# EAGLE board PCB (EAGLE 9.7.0)
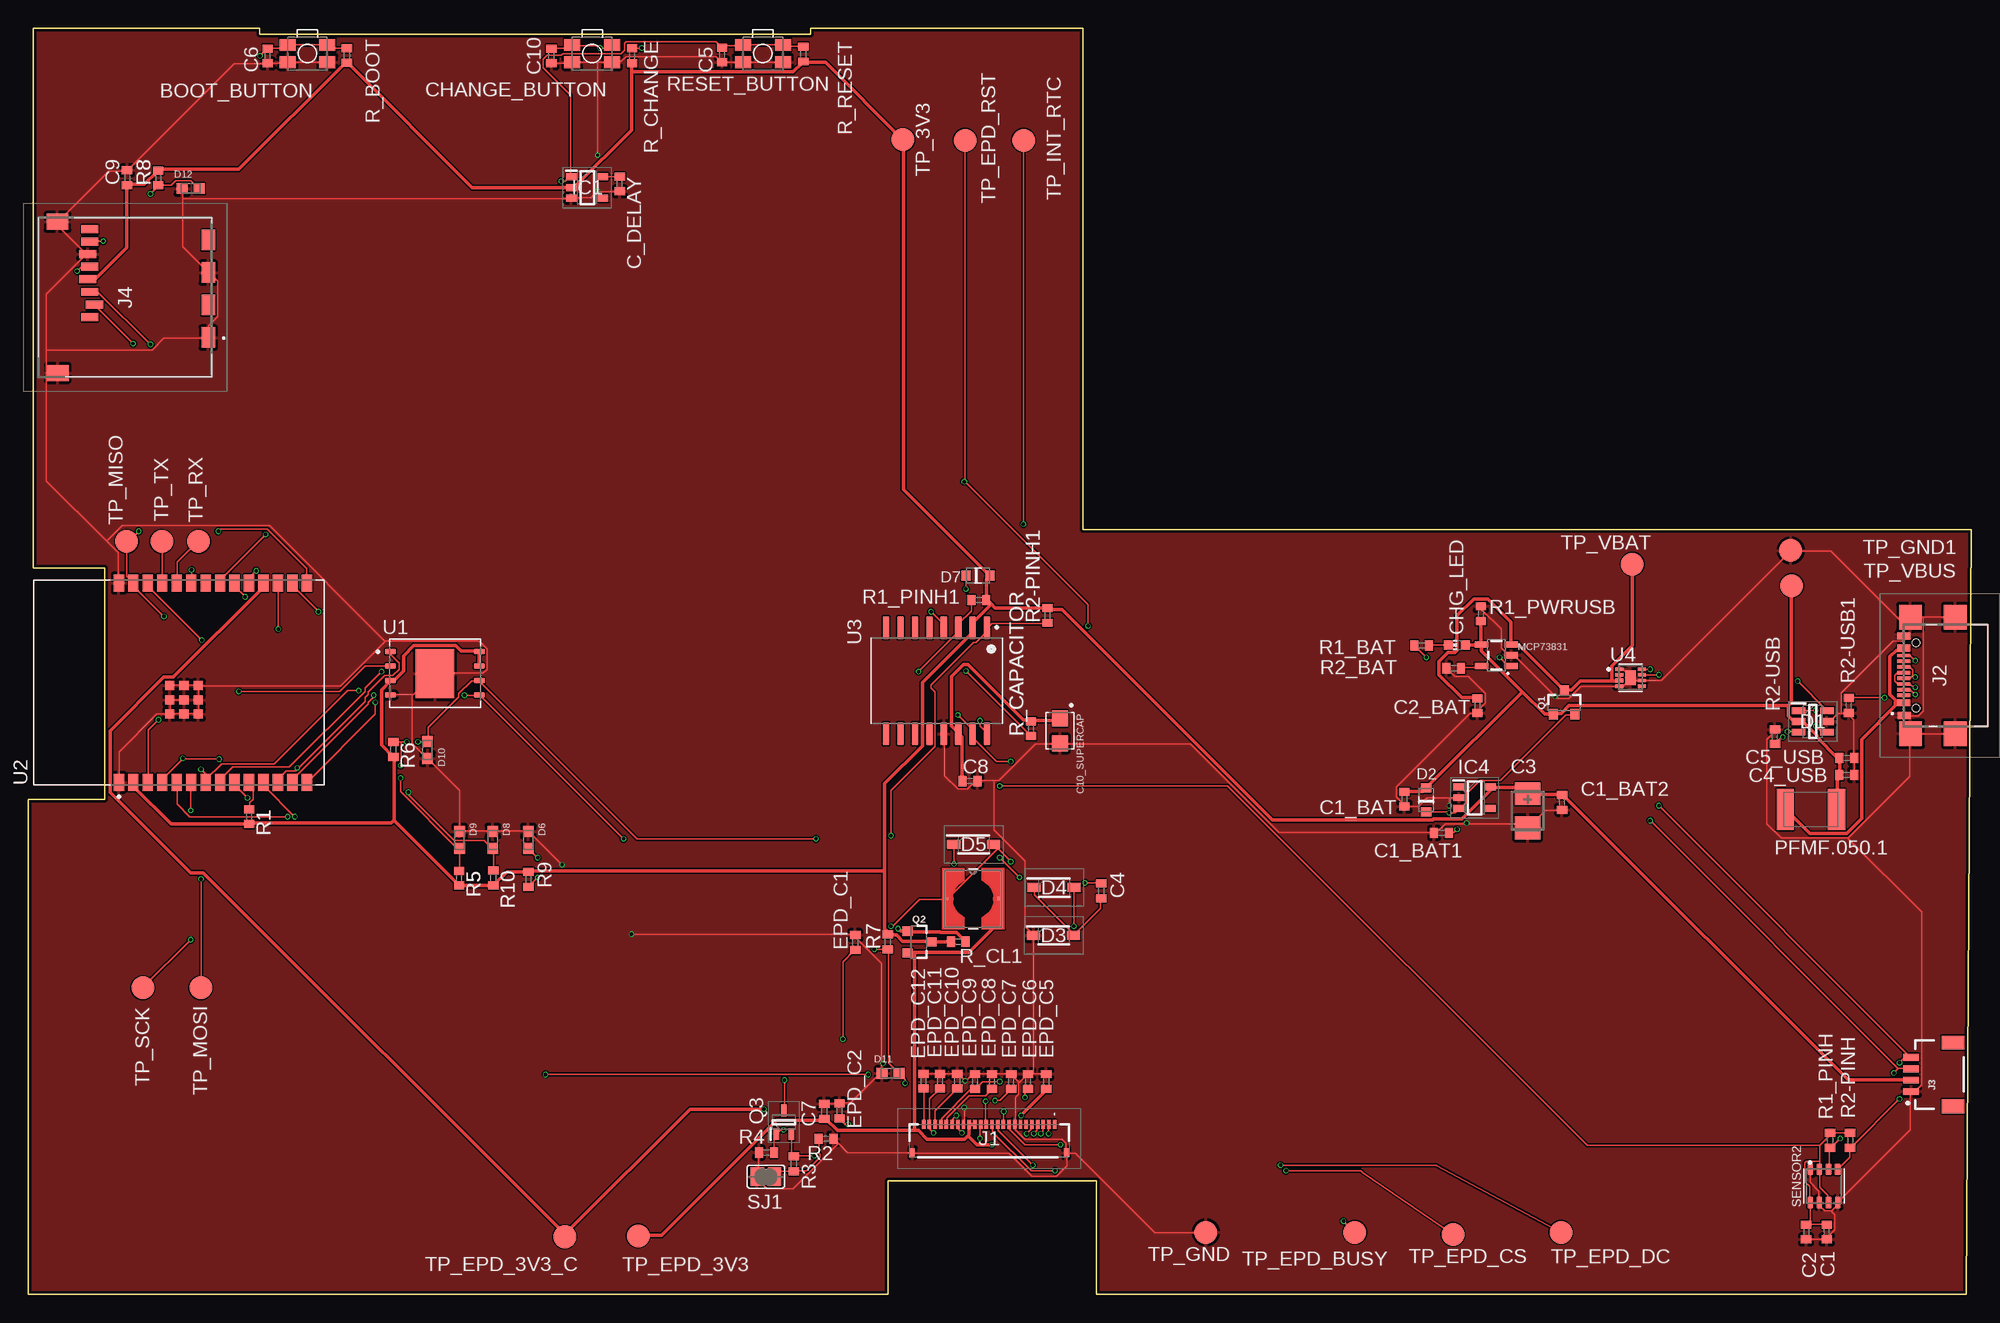
[diagram p0: board, top side]
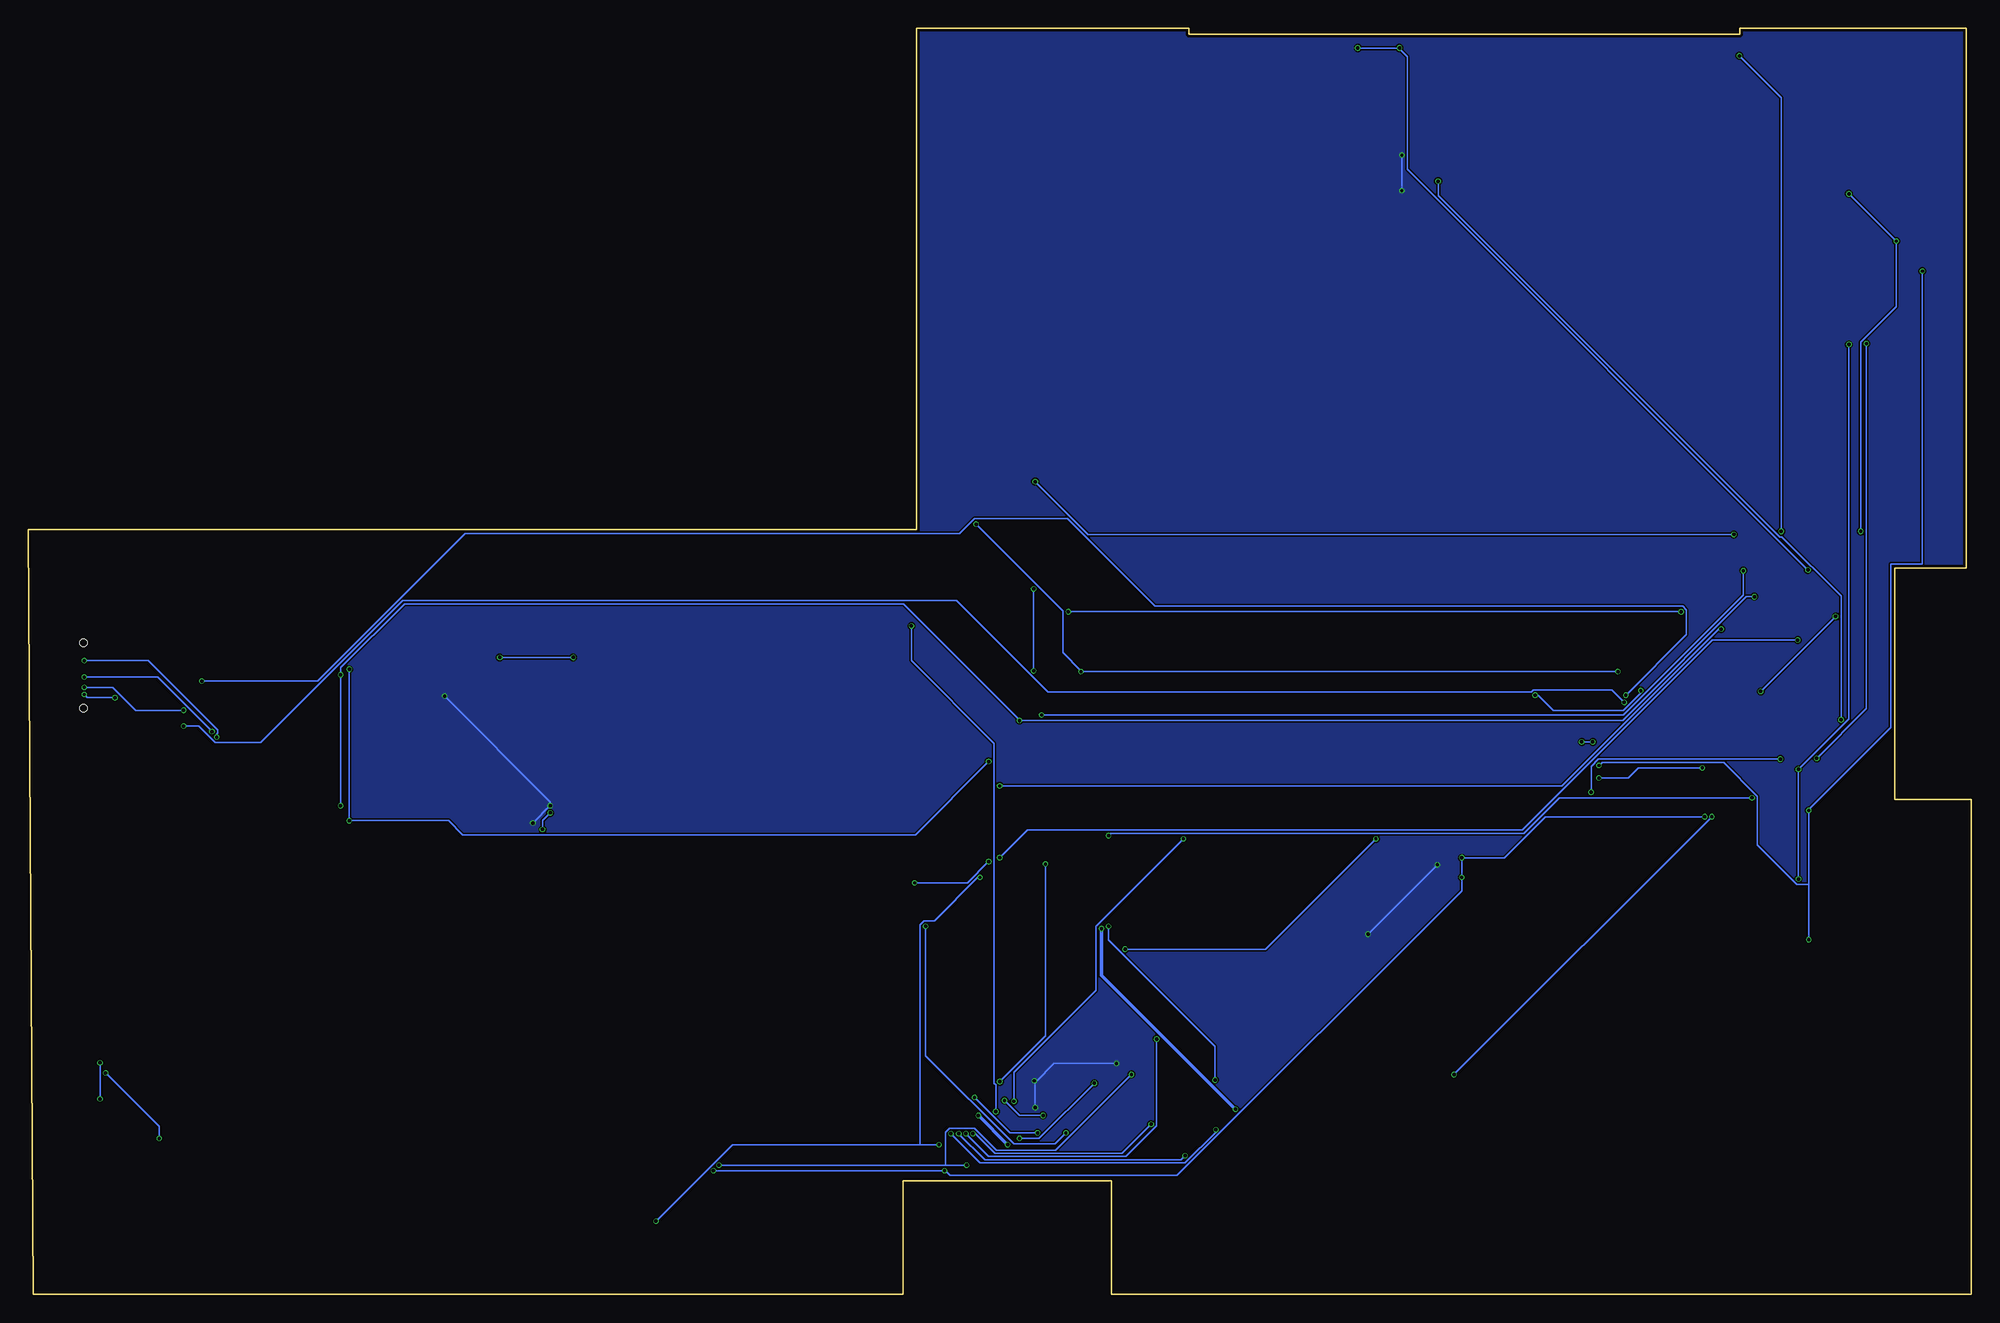
[diagram p1: board, bottom side, seen from below]

Size 170.6 x 111.2 mm. Coordinates in mm from the lower left corner, seen from the top.
Outline: 170.2,0 170.6,67.2 92.6,67.2 92.6,111.2 68.7,111.2 68.7,110.68 20.3,110.68 20.3,111.2 0.4,111.2 0.4,63.8 6.7,63.8 6.7,43.5 0,43.5 0,0 75.5,0 75.5,10 93.78,10 93.78,0 170.2,0
Copper layers (1*16): Top 0.035mm / dielectric 1.6mm / Bottom 0.035mm
Design rules "jlcpcb-2layers.dru *": minimum track width 5mil, minimum drill 0.3mm, track to track 5mil, track to pad 5mil, pad to pad 5mil, via to via 5mil, smd to smd 5mil, copper to edge 0.2mm, drill to drill 6mil, minimum pad ring 10mil, minimum via ring 3mil, stop-mask expansion 4mil, vias tented up to drill 0mil, thermal gap 10mil
Net classes: 0 default: width 0.15 mm; 1 Power: width 0.3 mm

## Footprints (pad centres in the part's own frame; a part is rotated, then mirrored left to right if it is on the bottom)
MYBUTTON = smd 1.4 x 1.05: 1 1.75,0.75; 2 -1.75,0.75; 3 -1.75,-0.75; 4 1.75,-0.75
EAGLE-LTSPICE_C0402 = smd 0.7 x 0.9: 1 -0.65,0; 2 0.65,0
RCL_CT3528 = smd 2 x 2.2: + -1.5,0; - 1.5,0
CAPCP3225X100N = smd 1.4 x 1.4: 1 -1.1,0; 2 1.1,0
ADAFRUIT_CHIP-LED0603 = smd 0.8 x 0.8: A 0,-0.75; C 0,0.75
SOT95P280X145-6N = smd 1.2 x 0.6: 1 -1.25,0.95; 2 -1.25,0; 3 -1.25,-0.95; 4 1.25,-0.95; 5 1.25,0; 6 1.25,0.95
ESP32_WROVER_AVX---SD0805S020S1R0_AVX_SD0805S020S1R0_0 = smd 0.8 x 0.9: 1 -1.05,0; 2 1.05,0
SOD3716X135N = smd 1.15 x 0.8: 1 -1.75,0; 2 1.75,0
DIOC1608X36N = smd 0.97 x 0.94: 1 -0.75,0; 2 0.75,0
SOT95P280X125-5N = smd 0.9 x 0.6: 1 -1.4,0.95; 2 -1.4,0; 3 -1.4,-0.95; 4 1.4,-0.95; 5 1.4,0.95
SOT95P280X120-5N = smd 0.9 x 0.6: 1 -1.4,0.95; 2 -1.4,0; 3 -1.4,-0.95; 4 1.4,-0.95; 5 1.4,0.95
FH34SRJ24S05SH99 = smd 0.3 x 0.8: 1 5.75,1.45; 2 5.25,1.45; 3 4.75,1.45; 4 4.25,1.45; 5 3.75,1.45; 6 3.25,1.45; 7 2.75,1.45; 8 2.25,1.45; 9 1.75,1.45; 10 1.25,1.45; 11 0.75,1.45; 12 0.25,1.45; 13 -0.25,1.45; 14 -0.75,1.45; 15 -1.25,1.45; 16 -1.75,1.45; 17 -2.25,1.45; 18 -2.75,1.45; 19 -3.25,1.45; 20 -3.75,1.45; 21 -4.25,1.45; 22 -4.75,1.45; 23 -5.25,1.45; 24 -5.75,1.45 | smd 0.4 x 0.8: MP1 6.75,-1.05; MP2 -6.75,-1.05
SAMACSYS_PARTS_USB4110GFA = smd 0.3 x 1.15: A1 -3.652,3.658; A4 -2.55,3.678; A5 -1.25,3.678; A6 -0.25,3.678; A7 0.25,3.678; A8 1.25,3.678; A9 2.55,3.678; A12 3.612,3.678; B1 3.312,3.678; B4 2.25,3.678; B5 1.75,3.678; B6 0.75,3.678; B7 -0.75,3.678; B8 -1.75,3.678; B9 -2.25,3.678; B12 -3.352,3.658 | smd 2.18 x 2: MP1 -5.11,-0.827; MP2 5.11,-0.827; MP3 -5.11,3.103; MP4 5.11,3.103 | hole 0.65: -2.89,2.603; 2.89,2.603
JST04_1MM_RA = smd 0.6 x 1.35: 1 -1.5,0; 2 -0.5,0; 3 0.5,0; 4 1.5,0 | smd 1.2 x 2: NC1 2.8,-3.675; NC2 -2.8,-3.675
112ATAARR03ATTEND = smd 1.8 x 1.2: G1 10.6,10.4; G2 4.9,10.4; S1 7.75,10.4; S2 2.05,10.4 | smd 1.4 x 1.9: G3 13.724,-2.814; G4 0.45,-2.85 | smd 0.7 x 1.5: P1 8.8,0; P2 7.7,0.4; P3 6.6,0; P4 5.5,-0.2; P5 4.4,0; P6 3.3,-0.2; P7 2.2,0; P8 1.1,0
IND_4828-WE-TPC_WRE = smd 0.15 x 0.15: 1 -2.286,0 | smd 0.3 x 0.3: 2 2.286,0
ESP32_WROVER_SPARKFUN-IC-POWER_SOT23-5 = smd 0.55 x 1.2: 1 -0.95,-1.3; 2 0,-1.3; 3 0.95,-1.3; 4 0.95,1.3; 5 -0.95,1.3
ESP32C6_VARISTOR_CT/CN1812 = smd 1.5 x 3.6: 1 -2.25,0; 2 2.25,0
ESP32_WROVER_SPARKFUN-DISCRETESEMI_SOT23-3 = smd 0.8 x 0.9: 1 -0.95,-1; 2 0.95,-1; 3 0,1.1
SOT65P210X110-3N = smd 1.05 x 0.5: 1 -1.05,0.65; 2 -1.05,-0.65; 3 1.05,0
ESP32_WROVER_EAGLE-LTSPICE_R0402 = smd 0.7 x 0.9: 1 -0.65,0; 2 0.65,0
ESP32_WROVER_BME680_PSON80P300X300X100-8N = smd 1.016 x 0.5: 1 1.458,1.2; 2 1.458,0.4; 3 1.458,-0.4; 4 1.458,-1.2; 5 -1.458,-1.22; 6 -1.458,-0.4; 7 -1.458,0.4; 8 -1.458,1.2
SJ = smd 1.168 x 1.6: 1 -0.762,0; 2 0.762,0
TP20R = smd 2 x 2: TP 0,0
SON127P600X800X80-9N = smd 0.94 x 0.44: 1 -3.895,1.905; 2 -3.895,0.635; 3 -3.895,-0.635; 4 -3.895,-1.905; 5 3.895,-1.905; 6 3.895,-0.635; 7 3.895,0.635; 8 3.895,1.905 | smd 3.4 x 4.3: 9 0,0
XCVR_ESP32-C6-WROOM-1-N8 = smd 1.5 x 0.9: 1 -8.75,5.26; 2 -8.75,3.99; 3 -8.75,2.72; 4 -8.75,1.45; 5 -8.75,0.18; 6 -8.75,-1.09; 7 -8.75,-2.36; 8 -8.75,-3.63; 9 -8.75,-4.9; 10 -8.75,-6.17; 11 -8.75,-7.44; 12 -8.75,-8.71; 13 -8.75,-9.98; 14 -8.75,-11.25; 15 8.75,-11.25; 16 8.75,-9.98; 17 8.75,-8.71; 18 8.75,-7.44; 19 8.75,-6.17; 20 8.75,-4.9; 21 8.75,-3.63; 22 8.75,-2.36; 23 8.75,-1.09; 24 8.75,0.18; 25 8.75,1.45; 26 8.75,2.72; 27 8.75,3.99; 28 8.75,5.26 | smd 0.8 x 0.8: 29_1 -2.755,0.79; 29_2 -1.505,0.79; 29_3 -0.255,0.79; 29_4 -2.755,-0.46; 29_5 -1.505,-0.46; 29_6 -0.255,-0.46; 29_7 -2.755,-1.71; 29_8 -1.505,-1.71; 29_9 -0.255,-1.71
SOIC127P1032X265-16N = smd 2.05 x 0.59: 1 -4.655,4.445; 2 -4.655,3.175; 3 -4.655,1.905; 4 -4.655,0.635; 5 -4.655,-0.635; 6 -4.655,-1.905; 7 -4.655,-3.175; 8 -4.655,-4.445; 9 4.655,-4.445; 10 4.655,-3.175; 11 4.655,-1.905; 12 4.655,-0.635; 13 4.655,0.635; 14 4.655,1.905; 15 4.655,3.175; 16 4.655,4.445
SON50P200X200X80-9N = smd 0.76 x 0.27: 1 -0.985,0.75; 4 -0.985,-0.75; 5 0.985,-0.75; 6 0.985,-0.25; 7 0.985,0.25; 8 0.985,0.75 | smd 0.76 x 0.3: 2 -0.985,0.25; 3 -0.985,-0.25 | smd 0.9 x 1.3: 9 0,0

## Placement (x,y rotation side)
BOOT_BUTTON  BUTTON_CUSYOMV1  [MYBUTTON]  24.5,109 180 top
C1  100nF  [EAGLE-LTSPICE_C0402]  157.94,5.49 270 top
C1_BAT  4.7uF  [EAGLE-LTSPICE_C0402]  120.83,43.51 270 top
C1_BAT1  4.7uF  [EAGLE-LTSPICE_C0402]  124.09,40.55 180 top
C1_BAT2  4.7uF  [EAGLE-LTSPICE_C0402]  134.68,43.23 270 top
C2  100nF  [EAGLE-LTSPICE_C0402]  156.12,5.49 270 top
C2_BAT  4.7uF  [EAGLE-LTSPICE_C0402]  127.24,51.71 270 top
C3  100uF TANT  [RCL_CT3528]  131.66,42.49 270 top
C4  4.7uF/25V  [EAGLE-LTSPICE_C0402]  94.21,35.45 90 top
C4_USB  100nF  [EAGLE-LTSPICE_C0402]  159.69,45.63 0 top
C5  1uF  [EAGLE-LTSPICE_C0402]  60.92,108.87 270 top
C5_USB  4.7uF  [EAGLE-LTSPICE_C0402]  159.7,47.13 0 top
C6  100nF  [EAGLE-LTSPICE_C0402]  21,108.79 270 top
C7  10uF  [EAGLE-LTSPICE_C0402]  69.89,16.09 90 top
C8  100nF  [EAGLE-LTSPICE_C0402]  82.68,45.09 0 top
C9  100nF  [EAGLE-LTSPICE_C0402]  8.66,98.09 90 top
C10  100nF  [EAGLE-LTSPICE_C0402]  45.92,108.79 270 top
C10_SUPERCAP  CPH3225A  [CAPCP3225X100N]  90.59,49.5 270 top
C_DELAY  100nF  [EAGLE-LTSPICE_C0402]  51.93,97.55 270 top
CHANGE_BUTTON  BUTTON_CUSYOMV1  [MYBUTTON]  49.5,109 180 top
CHG_LED  [ADAFRUIT_CHIP-LED0603]  125.45,57.05 90 top
D1  USBLC6-2SC6Y  [SOT95P280X145-6N]  156.7,50.33 0 top
D2  SD0805S020S1R0  [ESP32_WROVER_AVX---SD0805S020S1R0_AVX_SD0805S020S1R0_0]  122.74,43.44 90 top
D3  MBR0530  [SOD3716X135N]  90.03,31.54 0 top
D4  MBR0530  [SOD3716X135N]  90.07,35.74 0 top
D5  MBR0530  [SOD3716X135N]  83.01,39.54 0 top
D6  PGB1010603MR  [DIOC1608X36N]  43.9,39.93 270 top
D7  ESP32_WROVER_AVX---SD0805S020S1R0_AVX_SD0805S020S1R0_0_0AVX_SD0805S020S1R0_0_0  [ESP32_WROVER_AVX---SD0805S020S1R0_AVX_SD0805S020S1R0_0]  83.39,63.14 0 top
D8  PGB1010603MR  [DIOC1608X36N]  40.78,39.93 270 top
D9  PGB1010603MR  [DIOC1608X36N]  37.86,39.93 270 top
D10  PGB1010603MR  [DIOC1608X36N]  35.04,47.83 90 top
D11  PGB1010603MR  [DIOC1608X36N]  75.72,19.43 0 top
D12  PGB1010603MR  [DIOC1608X36N]  14.25,97.14 0 top
EPD_C1  1uF/50V  [EAGLE-LTSPICE_C0402]  72.61,30.93 90 top
EPD_C2  1uF/50V  [EAGLE-LTSPICE_C0402]  71.22,16.13 90 top
EPD_C5  1uF/50V  [EAGLE-LTSPICE_C0402]  89.38,18.71 90 top
EPD_C6  1uF/50V  [EAGLE-LTSPICE_C0402]  87.79,18.71 90 top
EPD_C7  1uF/50V  [EAGLE-LTSPICE_C0402]  86.3,18.71 90 top
EPD_C8  1uF/50V  [EAGLE-LTSPICE_C0402]  84.61,18.71 90 top
EPD_C9  1uF/50V  [EAGLE-LTSPICE_C0402]  83.12,18.71 90 top
EPD_C10  1uF/50V  [EAGLE-LTSPICE_C0402]  81.57,18.75 90 top
EPD_C11  1uF/50V  [EAGLE-LTSPICE_C0402]  80.05,18.75 90 top
EPD_C12  1uF/50V  [EAGLE-LTSPICE_C0402]  78.61,18.75 90 top
IC1  BD5229G-TR  [SOT95P280X125-5N]  49.07,97.23 0 top
IC4  XC6220A331MR-G  [SOT95P280X120-5N]  127.01,43.63 0 top
J1  FH34SRJ-24S-0.5SH_99_  [FH34SRJ24S05SH99]  84.37,13.5 0 top
J2  SAMACSYS_PARTS_USB4110-GF-A  [SAMACSYS_PARTS_USB4110GFA]  168.38,54.37 90 top
J3  QWIIC_RIGHT_ANGLE  [JST04_1MM_RA]  165.34,19.32 90 top
J4  112A-TAAR-R03_ATTEND  [112ATAARR03ATTEND]  5.4,94.66 270 top
L1  68uH  [IND_4828-WE-TPC_WRE]  82.97,34.75 0 top
MCP73831  ESP32_WROVER_SPARKFUN-IC-POWER_MCP73831  [ESP32_WROVER_SPARKFUN-IC-POWER_SOT23-5]  128.91,56.15 90 top
PFMF.050.1  [ESP32C6_VARISTOR_CT/CN1812]  156.54,42.61 0 top
Q1  20V/4.2A/52mΩ/1.4W  [ESP32_WROVER_SPARKFUN-DISCRETESEMI_SOT23-3]  134.87,51.96 0 top
Q2  20V/4.2A/52mΩ/1.4W  [ESP32_WROVER_SPARKFUN-DISCRETESEMI_SOT23-3]  78.19,30.96 270 top
Q3  SI1308EDL-T1-GE3  [SOT65P210X110-3N]  66.34,15.14 90 top
R1  10K  [ESP32_WROVER_EAGLE-LTSPICE_R0402]  19.39,41.97 270 top
R1_BAT  200  [ESP32_WROVER_EAGLE-LTSPICE_R0402]  122.35,57.01 180 top
R1_PINH  10K  [ESP32_WROVER_EAGLE-LTSPICE_R0402]  158.22,13.53 90 top
R1_PINH1  10K  [ESP32_WROVER_EAGLE-LTSPICE_R0402]  83.46,61 0 top
R1_PWRUSB  100k  [ESP32_WROVER_EAGLE-LTSPICE_R0402]  127.55,59.8 270 top
R2  2.2  [ESP32_WROVER_EAGLE-LTSPICE_R0402]  70.05,13.67 180 top
R2-PINH  10K  [ESP32_WROVER_EAGLE-LTSPICE_R0402]  159.98,13.53 90 top
R2-PINH1  10K  [ESP32_WROVER_EAGLE-LTSPICE_R0402]  89.49,59.65 90 top
R2-USB  5k1  [ESP32_WROVER_EAGLE-LTSPICE_R0402]  153.38,48.99 90 top
R2-USB1  5k1  [ESP32_WROVER_EAGLE-LTSPICE_R0402]  159.86,51.73 90 top
R2_BAT  2K  [ESP32_WROVER_EAGLE-LTSPICE_R0402]  125.16,55.01 0 top
R3  0.47  [ESP32_WROVER_EAGLE-LTSPICE_R0402]  67.21,11.49 90 top
R4  10K  [ESP32_WROVER_EAGLE-LTSPICE_R0402]  64.81,12.47 0 top
R5  10K  [ESP32_WROVER_EAGLE-LTSPICE_R0402]  37.83,36.57 270 top
R6  10K  [ESP32_WROVER_EAGLE-LTSPICE_R0402]  32.05,47.87 270 top
R7  10K  [ESP32_WROVER_EAGLE-LTSPICE_R0402]  75.47,30.97 90 top
R8  10K  [ESP32_WROVER_EAGLE-LTSPICE_R0402]  11.39,98.07 90 top
R9  10K  [ESP32_WROVER_EAGLE-LTSPICE_R0402]  43.91,36.47 90 top
R10  10K  [ESP32_WROVER_EAGLE-LTSPICE_R0402]  40.83,36.59 270 top
R_BOOT  10K  [ESP32_WROVER_EAGLE-LTSPICE_R0402]  27.97,108.83 270 top
R_CAPACITOR  15  [ESP32_WROVER_EAGLE-LTSPICE_R0402]  88.05,49.7 90 top
R_CHANGE  10K  [ESP32_WROVER_EAGLE-LTSPICE_R0402]  53.02,108.8 270 top
R_CL1  10K  [ESP32_WROVER_EAGLE-LTSPICE_R0402]  81.66,30.99 180 top
R_RESET  10K  [ESP32_WROVER_EAGLE-LTSPICE_R0402]  68.05,108.95 270 top
RESET_BUTTON  BUTTON_CUSYOMV1  [MYBUTTON]  64.5,109 180 top
SENSOR2  ESP32_WROVER_BME680_BME680  [ESP32_WROVER_BME680_PSON80P300X300X100-8N]  157.68,9.53 90 top
SJ1  [SJ]  64.76,10.35 0 top
TP_3V3  TPTP20R  [TP20R]  76.79,101.45 0 top
TP_EPD_3V3  TPTP20R  [TP20R]  53.54,5.15 0 top
TP_EPD_3V3_C  TPTP20R  [TP20R]  47.1,5.07 0 top
TP_EPD_BUSY  TPTP20R  [TP20R]  116.47,5.45 0 top
TP_EPD_CS  TPTP20R  [TP20R]  125.1,5.27 0 top
TP_EPD_DC  TPTP20R  [TP20R]  134.59,5.45 0 top
TP_EPD_RST  TPTP20R  [TP20R]  82.25,101.37 0 top
TP_GND  TPTP20R  [TP20R]  103.39,5.45 0 top
TP_GND1  TPTP20R  [TP20R]  154.77,65.35 0 top
TP_INT_RTC  TPTP20R  [TP20R]  87.4,101.37 0 top
TP_MISO  TPTP20R  [TP20R]  8.61,66.15 0 top
TP_MOSI  TPTP20R  [TP20R]  15.13,26.95 0 top
TP_RX  TPTP20R  [TP20R]  14.93,66.15 0 top
TP_SCK  TPTP20R  [TP20R]  10.05,26.95 0 top
TP_TX  TPTP20R  [TP20R]  11.71,66.15 0 top
TP_VBAT  TPTP20R  [TP20R]  140.85,64.15 0 top
TP_VBUS  TPTP20R  [TP20R]  154.85,62.27 0 top
U1  W25Q512JVEIQ  [SON127P600X800X80-9N]  35.7,54.56 0 top
U2  ESP32-C6-WROOM-1-N8  [XCVR_ESP32-C6-WROOM-1-N8]  13.2,53.74 90 top
U3  DS3231SN#  [SOIC127P1032X265-16N]  79.75,53.9 270 top
U4  MAX17048G+T10  [SON50P200X200X80-9N]  140.7,54.18 0 top

## Library data of the parts
BOOT_BUTTON CHANGE_BUTTON CHG_LED PFMF.050.1 RESET_BUTTON SJ1 TP_3V3 TP_EPD_3V3 TP_EPD_3V3_C TP_EPD_BUSY TP_EPD_CS TP_EPD_DC TP_EPD_RST TP_GND TP_GND1 TP_INT_RTC TP_MISO TP_MOSI TP_RX TP_SCK TP_TX TP_VBAT TP_VBUS = DeskAssistant v19 v1
C1 C1_BAT C1_BAT1 C1_BAT2 C2 C2_BAT C4 C4_USB C5 C5_USB C6-C10 C_DELAY EPD_C1 EPD_C2 EPD_C5-EPD_C12 = DeskAssistant v19 v1; SPICEMODEL: NONE; SPICEPREFIX: C
C3 = DeskAssistant v19 v1; SPICEPREFIX: C
C10_SUPERCAP = DeskAssistant v19 v1; AVAILABILITY: Not in stock; CHECK_PRICES: https://www.snapeda.com/parts/CPH3225A/Seiko+Instruments/view-part/?ref=eda; DESCRIPTION: 11 mF (EDLC) Supercapacitor 3.3 V 1210 (3225 Metric) - -; MF: Seiko Instruments; MP: CPH3225A; PACKAGE: 1210 Seiko; PRICE: None; PURCHASE-URL: https://www.snapeda.com/api/url_track_click_mouser/?unipart_id=562593&manufacturer=Seiko Instruments&part_name=CPH3225A&search_term=None; SNAPEDA_LINK: https://www.snapeda.com/parts/CPH3225A/Seiko+Instruments/view-part/?ref=snap
D1 = DeskAssistant v19 v1; AVAILABILITY: In Stock; CHECK_PRICES: https://www.snapeda.com/parts/USBLC6-2SC6Y/STMicroelectronics/view-part/?ref=eda; DESCRIPTION: 17V Clamp 5A (8/20µs) Ipp Tvs Diode Surface Mount SOT-23-6; MF: STMicroelectronics; MP: USBLC6-2SC6Y; PACKAGE: SOT-23-6 STMicroelectronics; PRICE: None; SNAPEDA_LINK: https://www.snapeda.com/parts/USBLC6-2SC6Y/STMicroelectronics/view-part/?ref=snap
D2 D7 = DeskAssistant v19 v1; CENTROID_NOT_SPECIFIED: No; DATASHEET: http://datasheets.avx.com/schottky.pdf; DIGIKEY_DESCRIPTION: DIODE SCHOTTKY 20V 1A 0805; DIGIKEY_PART_NUMBER: 478-7800-1-ND; LEAD_FREE: yes; MF: AVX; MOUSER_PART_NUMBER: 581-SD0805S020S1R0; PACKAGE: 0805 (2012 metric); PREFIX: D; ROHS: yes; TEMPERATURE_RANGE_HIGH: +125°C; TEMPERATURE_RANGE_LOW: -55°C
D3-D5 = DeskAssistant v19 v1; AVAILABILITY: In Stock; CHECK_PRICES: https://www.snapeda.com/parts/MBR0530/Onsemi/view-part/?ref=eda; DESCRIPTION: Diode Schottky 30 V 500mA Surface Mount SOD-123; MF: ON Semiconductor; MP: MBR0530; PACKAGE: SOD-123-2 ON Semiconductor; PRICE: None; PURCHASE-URL: https://www.snapeda.com/api/url_track_click_mouser/?unipart_id=179458&manufacturer=ON Semiconductor&part_name=MBR0530&search_term=None; SNAPEDA_LINK: https://www.snapeda.com/parts/MBR0530/Onsemi/view-part/?ref=snap
D6 D8-D12 = DeskAssistant v19 v1; AVAILABILITY: In Stock; CHECK_PRICES: https://www.snapeda.com/parts/PGB1010603MR/Littelfuse/view-part/?ref=eda; DESCRIPTION: 150V (Typ) Clamp - Ipp Tvs Diode Surface Mount 0603 (1608 Metric); MF: Littelfuse Inc.; MP: PGB1010603MR; PACKAGE: 0603 Littelfuse Inc.; PRICE: None; PURCHASE-URL: https://www.snapeda.com/api/url_track_click_mouser/?unipart_id=5659453&manufacturer=Littelfuse Inc.&part_name=PGB1010603MR&search_term=None; SNAPEDA_LINK: https://www.snapeda.com/parts/PGB1010603MR/Littelfuse/view-part/?ref=snap
IC1 = DeskAssistant v19 v1; DESCRIPTION: Voltage Detector with Adjustable Delay Time: CMOS processes are utilized to develop high precision, low current consumption CMOS reset ICs that allow arbitrary setting of the delay time. The extensive lineup includes both Nch Open Drain and CMOS output types in a wide range of detection voltages (from 2.3V to 6.0V, in 0.1V steps), enabling selection of the ideal solution based on customer requirements. In addition, the entire series is of course both lead-free and RoHS-compliant.; HEIGHT: 1.25mm; MANUFACTURER_NAME: ROHM Semiconductor; MANUFACTURER_PART_NUMBER: BD5229G-TR; MOUSER_PART_NUMBER: 755-BD5229G-TR; MOUSER_PRICE-STOCK: https://www.mouser.co.uk/ProductDetail/ROHM-Semiconductor/BD5229G-TR?qs=4kLU8WoGk0vvnhrrYwdszw%3D%3D
IC4 = DeskAssistant v19 v1; DESCRIPTION: LDO Voltage Regulators; HEIGHT: 1.2mm; MANUFACTURER_NAME: Torex; MANUFACTURER_PART_NUMBER: XC6220A331MR-G; MOUSER_PART_NUMBER: 865-XC6220A331MR-G; MOUSER_PRICE-STOCK: https://www.mouser.co.uk/ProductDetail/Torex-Semiconductor/XC6220A331MR-G?qs=AsjdqWjXhJ8ZSWznL1J0gg%3D%3D
J1 = DeskAssistant v19 v1; DESCRIPTION: 24 Position FFC, FPC Connector Contacts, Top and Bottom 0.020" (0.50mm) Surface Mount, Right Angle; HEIGHT: 1.1mm; MANUFACTURER_NAME: Hirose; MANUFACTURER_PART_NUMBER: FH34SRJ-24S-0.5SH(99); MOUSER_PART_NUMBER: 798-FH34SRJ24S05SH99; MOUSER_PRICE-STOCK: https://www.mouser.co.uk/ProductDetail/Hirose-Connector/FH34SRJ-24S-0.5SH99?qs=vcbW%252B4%252BSTIpKBl5ap9J8Fw%3D%3D
J2 = DeskAssistant v19 v1; DESCRIPTION: CONN USB 2.0 TYPE-C R/A SMT; HEIGHT: 3.26mm; MANUFACTURER_NAME: GCT (GLOBAL CONNECTOR TECHNOLOGY); MANUFACTURER_PART_NUMBER: USB4110-GF-A; MOUSER_PART_NUMBER: 640-USB4110-GF-A; MOUSER_PRICE-STOCK: https://www.mouser.co.uk/ProductDetail/GCT/USB4110-GF-A?qs=KUoIvG%2F9IlYiZvIXQjyJeA%3D%3D
J3 = DeskAssistant v19 v1; PROD_ID: CONN-13694
J4 = DeskAssistant v19 v1; DESCRIPTION: Micro SD Card Socket, Push-Push Type, Top Mount, SMT, H=1.83mm, 10u; HEIGHT: 1.9mm; MANUFACTURER_NAME: ATTEND; MANUFACTURER_PART_NUMBER: 112A-TAAR-R03 ATTEND
L1 = DeskAssistant v19 v1; COPYRIGHT: Copyright (C) 2024 Ultra Librarian. All rights reserved.; MANUFACTURER_PART_NUMBER: 744043680; MFR_NAME: Wurth Electronics
MCP73831 = DeskAssistant v19 v1; PROD_ID: IC-09995
Q1 Q2 = DeskAssistant v19 v1; PROD_ID: TRAN-14388
Q3 = DeskAssistant v19 v1; AVAILABILITY: In Stock; CHECK_PRICES: https://www.snapeda.com/parts/SI1308EDL-T1-GE3/Vishay+Siliconix/view-part/?ref=eda; DESCRIPTION: Si1308EDL-T1-GE3 N-channel MOSFET Transistor, 1.5 A, 30 V, 3-Pin SC-70 | Siliconix / Vishay SI1308EDL-T1-GE3; MF: Vishay Siliconix; MP: SI1308EDL-T1-GE3; PACKAGE: SOT-323 Vishay Semiconductor; PRICE: None; PURCHASE-URL: https://www.snapeda.com/api/url_track_click_mouser/?unipart_id=274603&manufacturer=Vishay Siliconix&part_name=SI1308EDL-T1-GE3&search_term=None; SNAPEDA_LINK: https://www.snapeda.com/parts/SI1308EDL-T1-GE3/Vishay+Siliconix/view-part/?ref=snap
R1 R1_BAT R1_PINH R1_PINH1 R1_PWRUSB R2 R2-PINH R2-PINH1 R2-USB R2-USB1 R2_BAT R3-R10 R_BOOT R_CAPACITOR R_CHANGE R_CL1 R_RESET = DeskAssistant v19 v1; SPICEMODEL: NONE; SPICEPREFIX: R
SENSOR2 = DeskAssistant v19 v1; AVAILABILITY: Unavailable; DESCRIPTION: Integrated Environmental Unit; MF: Bosch Sensortec; MP: BME680; PACKAGE: LGA-8 Bosch Tools; PRICE: None
U1 = DeskAssistant v19 v1; AVAILABILITY: In Stock; CHECK_PRICES: https://www.snapeda.com/parts/W25Q512JVEIQ/Winbond+Electronics/view-part/?ref=eda; DESCRIPTION: FLASH - NOR Memory IC 512Mb (64M x 8) SPI - Quad I/O 133 MHz 8-WSON (8x6); MF: Winbond Electronics; MP: W25Q512JVEIQ; PACKAGE: Package; PRICE: None; SNAPEDA_LINK: https://www.snapeda.com/parts/W25Q512JVEIQ/Winbond+Electronics/view-part/?ref=snap
U2 = DeskAssistant v19 v1; AVAILABILITY: In Stock; CHECK_PRICES: https://www.snapeda.com/parts/ESP32-C6-WROOM-1-N8/Espressif+Systems/view-part/?ref=eda; DESCRIPTION: Multiprotocol Modules ESP32-C6 module, Wi-Fi 6 in 2.4 GHz band, Bluetooth 5, Zigbee 3.0 and Thread. ESP34-WROOM Compatible - ENGINEERING SAMPLE; MF: Espressif Systems; MP: ESP32-C6-WROOM-1-N8; PACKAGE: None; PRICE: None; SNAPEDA_LINK: https://www.snapeda.com/parts/ESP32-C6-WROOM-1-N8/Espressif+Systems/view-part/?ref=snap
U3 = DeskAssistant v19 v1; AVAILABILITY: In Stock; CHECK_PRICES: https://www.snapeda.com/parts/DS3231SN%23/Analog+Devices/view-part/?ref=eda; DESCRIPTION: Extremely Accurate I²C-Integrated RTC/TCXO/Crystal; MF: Analog Devices; MP: DS3231SN#; PACKAGE: SOIC-16 Maxim; PRICE: None; PURCHASE-URL: https://www.snapeda.com/api/url_track_click_mouser/?unipart_id=99048&manufacturer=Analog Devices&part_name=DS3231SN#&search_term=None; SNAPEDA_LINK: https://www.snapeda.com/parts/DS3231SN%23/Analog+Devices/view-part/?ref=snap
U4 = DeskAssistant v19 v1; AVAILABILITY: In Stock; CHECK_PRICES: https://www.snapeda.com/parts/MAX17048G+T10/Analog+Devices/view-part/?ref=eda; DESCRIPTION: 3µA 1-Cell/2-Cell Fuel Gauge with ModelGauge; MF: Analog Devices; MP: MAX17048G+T10; PACKAGE: TDFN-8 Maxim; PRICE: None; PURCHASE-URL: https://www.snapeda.com/api/url_track_click_mouser/?unipart_id=329239&manufacturer=Analog Devices&part_name=MAX17048G+T10&search_term=None; SNAPEDA_LINK: https://www.snapeda.com/parts/MAX17048G+T10/Analog+Devices/view-part/?ref=snap

## Nets
3V3 [Power]: C1_BAT2.1 C3.+ C9.1 D7.2 IC1.2 IC4.5 J3.2 J4.P4 Q2.3 R1.2 R1_PINH1.2 R2-PINH1.2 R5.2 R6.2 R7.2 R8.2 R9.2 R10.2 R_BOOT.2 R_CHANGE.2 R_CL1.2 R_RESET.2 TP_3V3.TP U1.3 U1.7 U1.8 U2.2 U3.2
32KHZ: R2-PINH1.1 U2.9 U3.1
DN: D1.1 J2.A7 J2.B7
DP: D1.3 J2.A6 J2.B6
EPD_3V3 [Power]: C7.1 EPD_C5.1 J1.15 J1.16 L1.2 Q2.2 TP_EPD_3V3.TP
EPD_3V3_C [Power]: Q2.1 R_CL1.1 TP_EPD_3V3_C.TP U2.18
EPD_BUSY: J1.9 TP_EPD_BUSY.TP U2.26
EPD_CS: D6.2 J1.12 R9.1 TP_EPD_CS.TP U2.11
EPD_DC: J1.11 TP_EPD_DC.TP U2.5
EPD_RST: J1.10 TP_EPD_RST.TP U2.21
FLASH_CS: D9.2 R5.1 U1.1 U2.12
GDR: J1.2 Q3.1 R4.2
GND: BOOT_BUTTON.1 BOOT_BUTTON.2 C1.2 C1_BAT1.2 C1_BAT2.2 C1_BAT.2 C2.2 C2_BAT.2 C3.- C4_USB.2 C5.2 C5_USB.2 C6.2 C7.2 C8.2 C9.2 C10.2 C10_SUPERCAP.2 C_DELAY.2 CHANGE_BUTTON.1 CHANGE_BUTTON.2 D1.5 D3.1 D6.1 D8.1 D9.1 D10.1 D11.1 D12.1 EPD_C1.2 EPD_C2.2 EPD_C5.2 EPD_C6.2 EPD_C7.2 EPD_C8.2 EPD_C9.2 EPD_C10.2 EPD_C11.2 EPD_C12.2 IC1.3 IC4.2 J1.8 J1.17 J1.MP1 J1.MP2 J2.A1 J2.A12 J2.B1 J2.B12 J2.MP1 J2.MP2 J2.MP3 J2.MP4 J3.1 J4.G1 J4.G2 J4.G3 J4.G4 J4.P6 MCP73831.2 R1_PWRUSB.1 R2-USB1.1 R2-USB.2 R2.1 R2_BAT.1 R4.1 RESET_BUTTON.1 RESET_BUTTON.2 SENSOR2.1 SENSOR2.5 SENSOR2.7 SJ1.1 TP_GND1.TP TP_GND.TP U1.4 U1.9 U2.1 U2.28 U2.29_1 U2.29_2 U2.29_3 U2.29_4 U2.29_5 U2.29_6 U2.29_7 U2.29_8 U2.29_9 U3.13 U4.1 U4.4 U4.6 U4.9
GPIO8: R1.1 U2.10
I2C_PW: C1.1 C2.1 R1_PINH.2 R2-PINH.2 SENSOR2.2 SENSOR2.6 SENSOR2.8 U2.17
INT_RTC: R1_PINH1.1 TP_INT_RTC.TP U2.8 U3.3
IO/BOOT: BOOT_BUTTON.3 BOOT_BUTTON.4 C6.1 R_BOOT.1 U2.15
IO/CHANGE: C10.1 CHANGE_BUTTON.3 CHANGE_BUTTON.4 R_CHANGE.1 U2.23
MISO: D12.2 J4.P7 R8.1 TP_MISO.TP U1.2 U2.27
MOSI: D11.2 J1.14 J4.P3 R7.1 TP_MOSI.TP U1.5 U2.7
N$1: J2.A5 R2-USB1.2
N$2: J2.B5 R2-USB.1
N$3: C1_BAT1.1 D2.1 IC4.1 IC4.3 Q1.2
N$4: C4.1 D3.2 D4.1
N$5: EPD_C12.1 J1.24
N$6: CHG_LED.C R1_BAT.1
N$7: MCP73831.1 R1_BAT.2
N$8: MCP73831.5 R2_BAT.2
N$9: C_DELAY.1 IC1.5
N$10: EPD_C10.1 J1.22
N$11: D7.1 R_CAPACITOR.1
N$12: EPD_C8.1 J1.20
N$13: EPD_C7.1 J1.19
N$14: EPD_C6.1 J1.18
N$21: EPD_C1.1 J1.4
N$22: EPD_C2.1 J1.5
PREVGH: D5.1 EPD_C9.1 J1.21
PREVGL: D4.2 EPD_C11.1 J1.23
RESE: J1.3 Q3.2 R3.2
RESE': R2.2 R3.1 SJ1.2
RESET: C5.1 IC1.1 R_RESET.1 RESET_BUTTON.3 RESET_BUTTON.4 U2.3
RTC_RST: U2.16 U3.4
RX: TP_RX.TP U2.24
SCK: D10.2 J1.13 J4.P5 R6.1 TP_SCK.TP U1.6 U2.6
SCL: J3.4 R2-PINH.1 SENSOR2.4 U2.20 U3.16 U4.7
SDA: J3.3 R1_PINH.1 SENSOR2.3 U2.19 U3.15 U4.8
SRC: C4.2 D5.2 L1.1 Q3.3
SS_SD: D8.2 J4.P2 R10.1 U2.4
TX: TP_TX.TP U2.25
USB_D+: D1.4 U2.14
USB_D-: D1.6 U2.13
VBAT [Power]: C2_BAT.1 MCP73831.3 Q1.3 TP_VBAT.TP U4.2 U4.3
VBUS [Power]: C1_BAT.1 C4_USB.1 C5_USB.1 CHG_LED.A D1.2 D2.2 MCP73831.4 PFMF.050.1.2 Q1.1 R1_PWRUSB.2 TP_VBUS.TP
VRTC [Power]: C8.1 C10_SUPERCAP.1 R_CAPACITOR.2 U3.14
VUSB [Power]: J2.A4 J2.A9 J2.B4 J2.B9 PFMF.050.1.1

## Tracks (layer width: path | path; a pad name or v marks a point on that pad's centre or on a via)
3V3
  Top 0.3: 52.96,107.41 52.96,108.1 R_CHANGE.2 | 52.96,107.41 52.96,102.28 47.98,97.3 47.7,97.3 IC1.2 47.56,97.23 38.97,97.23 28.1,108.1 R_BOOT.2 27.96,108.17 27.82,108.17 18.47,98.82 11.48,98.82 R8.2 11.34,98.68 10.16,97.5 8.71,97.5 C9.1 8.64,97.3 8.64,91.96 5.87,89.19 5.25,89.19 J4.P4 | 52.96,107.41 67.16,107.41 67.92,108.17 R_RESET.2 68.06,108.24 70,108.24 TP_3V3.TP 76.85,101.31 76.85,70.7 84.33,63.23 D7.2 84.4,63.09 84.12,62.81 84.12,61.01 R1_PINH1.2 84.26,60.94 84.57,60.63 | J3.2 165.28,18.84 159.81,18.84 134.81,43.84 C1_BAT2.1 134.68,43.9 131.77,43.9 C3.+ 131.63,44.04 131.14,44.53 128.44,44.53 IC4.5 128.37,44.39 128.37,44.25 125.88,41.76 123.39,41.76 123.32,41.69 109.26,41.69 90.77,60.18 89.59,60.18 R2-PINH1.2 89.46,60.32 84.89,60.32 84.57,60.63 | R_CL1.2 81.01,30.95 79.34,30.95 Q2.3 79.21,31.02 76.78,31.02 76.23,31.58 75.54,31.58 R7.2 75.4,31.72 75.4,31.92 75.19,32.13 75.19,37.19 | 84.57,60.63 82.95,59 82.95,58.59 U3.2 82.88,58.45 82.88,58.1 78.51,53.74 78.51,48.2 75.19,44.87 75.19,37.19 | U2.2 9.26,44.94 9.26,44.6 12.52,41.34 19.38,41.34 R1.2 19.51,41.41 31.84,41.41 31.98,41.55 32.12,41.62 | U1.7 39.6,55.26 39.6,56.44 U1.8 39.46,56.51 38,56.51 37.52,56.99 33.85,56.99 32.95,56.09 32.95,54.78 32.12,53.95 31.91,53.95 U1.3 31.77,53.88 31.01,53.12 31.01,48.27 R6.2 32.12,47.09 32.12,41.62 | 32.12,41.62 37.73,36.01 R5.2 37.86,35.94 40.77,35.94 R10.2 40.91,36.01 42.02,37.12 43.89,37.12 R9.2 44.03,37.19 75.19,37.19
32KHZ  (via drill 0.3)
  Top 0.15: R2-PINH1.1 89.46,58.93 84.61,58.93 84.26,58.59 U3.1 84.19,58.52 84.19,58.24 83.22,57.27 83.02,57.27 79.28,53.53 79.28,53.25 79.62,52.91 79.62,48.13 75.74,44.25 v75.74,40.3 | v19.24,43.63 18.13,44.74 18.13,44.94 U2.9
  Bottom 0.15: v19.24,43.63 36.13,43.63 39.25,40.51 75.54,40.51 v75.74,40.3
DN  (via drill 0.3)
  Top 0.15: J2.A7 164.66,54.57 164.11,54.57 163.9,54.36 163.9,53.88 164.11,53.67 164.66,53.67 J2.B7 164.73,53.6 165.28,53.6 165.56,53.32 v165.7,53.32 | v156.97,51.31 155.45,51.31 D1.1
  Bottom 0.15: v156.97,51.31 161.2,51.31 163.21,53.32 v165.7,53.32
DP  (via drill 0.3)
  Top 0.15: 165.49,54.36 165.28,54.15 164.73,54.15 J2.A6 | 165.49,54.36 165.49,54.85 165.28,55.05 164.73,55.05 J2.B6 | v154.48,49.44 155.38,49.44 D1.3 | v165.7,54.22 165.56,54.36 165.49,54.36
  Bottom 0.15: v154.48,49.44 159.26,54.22 v165.7,54.22
EPD_3V3  (via drill 0.3)
  Top 0.3: 77.82,30.05 82.6,30.05 85.23,32.69 85.23,34.69 L1.2 | 77.82,30.05 77.2,30.05 Q2.2 | J1.15 83.08,14.96 82.67,14.96 J1.16 82.6,14.82 82.6,14.06 82.5,13.95 | 77.82,14.4 78.17,14.4 78.93,13.64 82.18,13.64 82.5,13.95 | 77.82,14.4 71.03,14.4 70.07,15.37 69.93,15.37 C7.1 69.79,15.3 65.7,15.3 55.59,5.19 53.58,5.19 TP_EPD_3V3.TP | v87.17,15.72 89.32,17.87 89.32,18 EPD_C5.1 | v84.61,13.16 83.29,13.16 82.5,13.95 | 77.82,14.4 77.82,30.05
  Bottom 0.3: v84.61,13.16 v87.17,15.72
EPD_3V3_C  (via drill 0.3)
  Top 0.3: R_CL1.1 82.25,31.02 81.49,31.79 80.11,31.79 80.04,31.86 77.2,31.86 Q2.1 77.06,31.92 76.58,31.92 v76.37,32.13 | U2.18 20.62,62.46 20.62,62.12 12.73,54.22 11.9,54.22 7.19,49.51 7.19,44.11 14.25,37.05 15.36,37.05 47.08,5.33 47.08,5.12 TP_EPD_3V3_C.TP 47.21,5.4 58.09,16.27 v64.59,16.27
  Bottom 0.3: v76.37,32.13 76.37,28.05 v64.59,16.27
EPD_BUSY  (via drill 0.3)
  Top 0.15: v90.63,13.16 87.52,13.16 86.13,14.54 86.13,14.89 J1.9 | v115.49,6.44 116.46,5.47 TP_EPD_BUSY.TP | v15.22,57.48 10.51,62.19 10.51,62.46 U2.26 | v87.03,36.63 v85.3,38.36
  Bottom 0.15: 92.3,13.16 108.78,13.16 v115.49,6.44 | 92.3,13.16 v90.63,13.16 | v15.22,57.48 22.7,57.48 39.39,40.79 82.88,40.79 v85.3,38.36 | v87.03,36.63 87.24,36.63 91.05,32.83 91.95,32.83 92.3,32.48 92.3,13.16
EPD_CS  (via drill 0.3)
  Top 0.15: v44.72,36.63 43.96,35.87 R9.1 | v44.72,38.36 43.96,39.13 D6.2 | v23.39,41.97 20.69,44.67 20.69,44.94 U2.11 | v90.15,10.87 88.07,10.87 84.68,14.27 84.68,14.89 J1.12 | v110.44,10.87 117.02,10.87 117.18,10.71 TP_EPD_CS.TP
  Bottom 0.15: v23.39,41.97 37.38,41.97 40.98,38.36 v44.72,38.36 v44.72,36.63 44.72,35.46 69.72,10.46 89.66,10.46 90.08,10.87 v90.15,10.87 v110.44,10.87
EPD_DC  (via drill 0.3)
  Top 0.15: v88.21,11.36 85.16,14.4 85.16,14.89 J1.11 | v109.95,11.36 123.67,11.36 123.71,11.32 TP_EPD_DC.TP | v22.77,41.97 14.18,41.97 13.07,43.07 13.07,44.94 U2.5 | v73.74,19.32 v45.41,19.32
  Bottom 0.15: v109.95,11.36 90.08,11.36 | 90.08,11.36 v88.21,11.36 | v45.41,19.32 v22.77,41.97 | v73.74,19.32 80.38,12.67 85.58,12.67 87.52,14.61 89.73,14.61 90.08,14.27 90.08,11.36
EPD_RST  (via drill 0.3)
  Top 0.15: v85.65,16.07 85.65,14.96 J1.10 | v93.06,58.72 93.06,60.59 82.25,71.4 | 82.25,71.4 82.25,101.31 TP_EPD_RST.TP | v20.83,66.76 16.88,62.81 16.88,62.53 U2.21 | v82.18,71.4 82.25,71.4
  Bottom 0.15: v85.65,16.07 85.65,18.42 85.78,18.56 85.78,48.41 93.06,55.68 v93.06,58.72 | v20.83,66.76 77.55,66.76 v82.18,71.4
FLASH_CS  (via drill 0.3)
  Top 0.15: R5.1 37.86,37.26 37.86,39.13 D9.2 37.8,39.2 37.66,39.2 32.67,44.18 v32.67,45.36 | 23.7,46.22 23.46,45.98 22.63,45.98 21.94,45.29 21.94,45.01 U2.12 | 23.7,46.22 29.55,52.08 29.55,52.42 29.83,52.7 29.83,52.91 31.29,54.36 31.98,54.36 32.53,54.91 32.53,55.47 31.84,56.16 31.84,56.44 U1.1 | v23.6,46.26 23.67,46.26 23.7,46.22
  Bottom 0.15: v32.67,45.36 30.11,45.36 29.21,46.26 v23.6,46.26
GDR  (via drill 0.3)
  Top 0.15: v89.59,14.13 89.59,14.89 J1.2 | v66.33,14.47 66.05,14.47 65.7,14.13 Q3.1 65.63,14.06 65.5,13.92 65.5,12.53 R4.2
  Bottom 0.15: v89.59,14.13 87.03,11.56 69.03,11.56 66.33,14.27 v66.33,14.47
GND  (via drill 0.3)
  Top 0.15: C10.2 45.97,108.17 47.63,108.17 47.7,108.24 CHANGE_BUTTON.1 47.77,108.24 49.98,108.24 | 49.98,108.24 51.23,108.24 CHANGE_BUTTON.2 51.3,108.31 52.06,108.31 52.48,108.72 60.37,108.72 60.85,108.24 C5.2 60.92,108.24 62.73,108.24 RESET_BUTTON.1 62.79,108.24 66.19,108.24 RESET_BUTTON.2 | 49.98,96.88 49.43,96.33 47.7,96.33 IC1.3 47.63,96.26 13.56,96.26 | 49.98,96.88 51.92,96.88 C_DELAY.2 | 13.56,96.26 13.56,92.03 15.77,89.82 J4.G2 15.84,89.75 16.61,88.99 16.61,85.87 15.84,85.11 15.84,84.07 J4.G1 15.77,84 11.9,84 10.86,82.96 1.58,82.96 | 13.56,96.26 13.56,97.09 D12.1 | v49.98,100.07 49.98,108.24 | v49.98,96.95 49.98,96.88 | U2.29_3 12.45,53.53 13.63,53.53 U2.29_6 13.7,53.53 14.87,53.53 U2.29_9 | U2.29_1 12.45,51.04 12.45,52.22 U2.29_2 12.52,52.22 13.63,52.22 U2.29_5 | U2.29_1 12.52,51.04 13.63,51.04 U2.29_4 13.7,51.04 14.87,51.04 U2.29_7 14.94,51.04 14.94,52.22 U2.29_8 14.94,52.28 14.94,53.46 U2.29_9 | U2.1 7.95,45.01 7.95,47.64 11.27,50.97 12.38,50.97 U2.29_1 | 33.71,52.7 33.85,52.7 35.65,54.5 U1.9 35.72,54.57 39.94,54.57 40.29,54.91 40.29,56.72 39.6,57.41 31.36,57.41 31.32,57.37 | 33.71,52.7 31.84,52.7 U1.4 | 33.71,52.7 33.71,48.41 35.02,47.09 D10.1 35.09,47.02 37.86,44.25 37.86,40.79 D9.1 37.86,40.72 40.77,40.72 D8.1 40.84,40.72 43.89,40.72 D6.1 43.96,40.65 v46.87,37.74 | 31.32,57.37 27.41,53.46 15.01,53.46 U2.29_9 | 6.88,66.17 1.58,71.47 1.58,81.02 J4.G3 1.58,81.09 1.58,82.96 | 6.88,66.17 7.88,65.16 7.88,62.53 U2.28 | BOOT_BUTTON.2 26.23,108.24 22.77,108.24 BOOT_BUTTON.1 22.7,108.24 22.63,108.17 21.04,108.17 C6.2 20.97,108.1 18.06,108.1 8.71,98.75 C9.2 8.64,98.68 7.05,98.68 2.62,94.25 J4.G4 2.62,94.18 2.62,93.83 5.04,91.41 5.18,91.41 J4.P6 5.04,91.34 1.58,87.88 1.58,82.96
  Top 0.15: 31.32,57.37 21.18,67.52 8.23,67.52 6.88,66.17 | C7.2 69.93,16.76 71.17,16.76 EPD_C2.2 71.24,16.83 72.21,16.83 74.84,19.46 D11.1 74.91,19.46 74.91,20.29 | 74.91,20.29 74.91,29.09 72.63,31.37 72.63,31.58 EPD_C1.2 72.56,31.65 v52.96,31.65 | R4.1 64.11,12.46 64.11,10.46 64.04,10.39 SJ1.1 64.04,10.32 64.04,10.11 64.87,9.28 67.16,9.28 71.14,13.26 | 71.14,13.26 70.76,13.64 R2.1 | 71.14,13.26 71.94,12.46 77.61,12.46 J1.MP2 77.68,12.4 86.13,12.4 88.14,10.39 90.29,10.39 91.19,11.29 91.19,12.33 J1.MP1 | U3.13 80.45,49.24 80.45,45.57 81.63,44.39 82.46,44.39 83.15,45.08 83.29,45.08 C8.2 83.36,45.15 84.82,45.15 | 84.82,45.15 85.23,45.15 88.42,48.34 90.56,48.34 C10_SUPERCAP.2 90.63,48.34 102.06,48.34 109.81,40.58 123.39,40.58 C1_BAT1.2 123.46,40.58 123.67,40.58 124.43,41.34 126.3,41.34 | EPD_C12.2 78.65,19.39 80.04,19.39 EPD_C11.2 80.11,19.39 EPD_C10.2 81.63,19.39 v82.25,18.77 82.32,18.77 82.88,19.32 83.08,19.32 EPD_C9.2 83.15,19.39 84.61,19.39 EPD_C8.2 84.68,19.39 86.27,19.39 EPD_C7.2 86.34,19.32 86.96,18.7 86.96,18.63 | v82.18,16.41 82.18,14.96 J1.17 | 86.96,18.63 86.96,17.59 86.69,17.31 86.69,14.96 J1.8 86.69,14.89 86.69,14.47 87.52,13.64 90.77,13.64 91.12,13.3 91.12,12.46 J1.MP1 | 86.96,18.63 87.03,18.63 87.72,19.32 EPD_C6.2 87.79,19.39 88.28,19.39 | 88.28,19.39 89.32,19.39 EPD_C5.2 | 88.28,19.39 88.28,31.51 D3.1 88.28,31.58 87.52,32.34 87.52,38.09 84.82,40.79 84.82,45.15 | TP_GND.TP 103.36,5.4 98.94,5.4 91.95,12.4 91.19,12.4 J1.MP1 | v75.05,20.29 74.91,20.29 | C2.2 156.14,4.85 157.88,4.85 C1.2 157.88,4.92 158.64,5.68 158.64,6.99 158.36,7.27 158.36,7.34
  Top 0.15: 158.36,7.34 157.74,7.34 157.32,7.76 157.32,8.03 SENSOR2.7 157.25,8.1 157.25,9.07 156.49,9.83 156.49,10.94 SENSOR2.1 | 158.36,7.34 158.84,7.83 158.84,8.03 SENSOR2.5 158.91,8.1 165.28,14.47 165.28,17.8 J3.1 165.35,17.87 165.7,17.87 166.25,18.42 166.25,33.59 159.81,40.03 159.81,40.1 | J2.B12 164.73,51.31 164.73,51.04 J2.A1 164.73,50.97 164.73,50.83 | 159.81,40.1 153.93,40.1 152.68,41.34 152.68,48.75 153.37,49.44 153.37,49.58 R2-USB.2 | 159.81,40.1 165.22,45.5 165.22,49.24 J2.MP3 | 164.73,50.83 164.73,49.79 165.22,49.31 J2.MP3 | J2.MP1 169.16,49.24 165.35,49.24 J2.MP3 | 126.3,41.34 131.28,41.34 131.63,41 C3.- 131.7,41 133.22,42.52 134.68,42.52 C1_BAT2.2 | 124.77,43.63 IC4.2 | 124.77,43.63 122.83,43.63 122.07,42.87 120.89,42.87 C1_BAT.2 120.89,42.94 120.13,43.7 120.13,44.6 126.57,51.04 127.2,51.04 C2_BAT.2 127.27,51.11 127.27,51.24 127.96,51.94 127.96,52.77 126.44,54.29 125.26,54.29 124.57,54.98 R2_BAT.1 | 124.77,43.63 v124.77,42.94 | v126.3,41.41 126.3,41.34 | U4.9 140.63,54.15 140.63,54.02 140.08,53.46 139.73,53.46 U4.4 139.66,53.39 136.34,53.39 135.3,52.35 134.26,52.35 v134.05,52.56 130.52,56.09 130.24,56.09 MCP73831.2 130.18,56.16 129.97,56.16 129.34,56.78 129.34,58.45 127.61,60.18 127.61,60.39 R1_PWRUSB.1 | U4.1 139.73,54.91 140.08,54.91 140.63,54.36 140.63,54.22 U4.9 | U4.9 140.63,53.95 141.67,53.95 U4.6 141.74,53.95 143.4,53.95 154.76,65.3 TP_GND1.TP 154.83,65.3 158.29,65.3 164.66,58.93 J2.MP4 | C4_USB.2 160.37,45.64 160.37,47.09 C5_USB.2 160.3,47.16 160.3,50.48 159.81,50.97 R2-USB1.1 159.81,51.04 159.19,51.04 | 159.19,51.04 158.91,51.04 158.22,50.34 158.01,50.34 D1.5
  Top 0.15: J2.MP4 165.22,59.42 164.73,58.93 164.73,57.76 J2.A12 164.73,57.69 164.73,57.48 J2.B1 164.66,57.41 163.76,57.41 159.19,52.84 159.19,51.04 | 166.39,59.49 165.35,59.49 J2.MP4 | 166.39,59.49 169.16,59.49 J2.MP2 | 164.73,50.83 165.98,50.83 166.39,51.24 166.39,59.49
  Bottom 0.15: v49.98,96.95 v49.98,100.07 | v82.18,16.41 82.18,18.7 v82.25,18.77 82.11,18.7 80.52,20.29 v75.05,20.29 | v126.3,41.41 v124.77,42.94 124.77,43.28 v134.05,52.56 | v52.96,31.65 v46.87,37.74
  pour Top: -12.42,-6.92 180.42,-6.92 180.42,115.92 -12.42,115.92
  pour Bottom: -15.42,-9.92 184.42,-9.92 184.42,118.92 -15.42,118.92
GPIO8
  Top 0.15: R1.1 19.44,42.66 19.44,43.21 19.72,43.49 19.72,44.6 19.38,44.94 U2.10
I2C_PW  (via drill 0.3)
  Top 0.15: C1.1 157.88,6.16 156.14,6.16 C2.1 156.49,6.23 156.49,8.03 SENSOR2.8 156.42,8.1 156.42,9.49 156,9.9 156,11.56 156.14,11.7 157.32,11.7 | R2-PINH.2 159.95,14.2 158.22,14.2 R1_PINH.2 158.15,14.13 158.15,13.92 157.32,13.09 | SENSOR2.6 158.01,8.1 158.01,8.73 157.32,9.42 157.32,10.94 SENSOR2.2 157.32,11.01 157.32,11.7 | 157.32,11.7 157.32,13.09 | v21.94,58.45 21.94,62.46 U2.17 | v85.3,44.67 105.31,44.67 136.89,13.09 157.32,13.09
  Bottom 0.15: v21.94,58.45 22.14,58.45 35.92,44.67 v85.3,44.67
INT_RTC  (via drill 0.3)
  Top 0.15: R1_PINH1.1 82.81,60.94 82.81,60.04 81.7,58.93 81.7,58.59 U3.3 81.63,58.52 81.63,58.17 v78.17,54.71 | v31.01,54.71 29.55,53.25 29.55,52.98 22.91,46.33 17.92,46.33 16.88,45.29 16.88,45.01 U2.8 | v87.38,67.66 87.38,101.31 TP_INT_RTC.TP
  Bottom 0.15: v31.01,54.71 v78.17,54.71 78.17,54.78 79.76,56.37 79.76,60.04 v87.38,67.66
IO/BOOT  (via drill 0.3)
  Top 0.15: R_BOOT.1 26.51,109.48 26.3,109.69 BOOT_BUTTON.3 26.23,109.76 22.77,109.76 BOOT_BUTTON.4 22.7,109.69 22.49,109.48 21.04,109.48 C6.1 20.97,109.42 v20.34,108.79 | v16.67,67.03 16.88,67.24 20.97,67.24 24.43,63.78 24.43,62.53 U2.15
  Bottom 0.15: v16.67,67.03 16.67,105.12 v20.34,108.79
IO/CHANGE  (via drill 0.3)
  Top 0.15: C10.1 45.97,109.48 47.49,109.48 47.7,109.69 CHANGE_BUTTON.4 47.77,109.69 49.91,109.69 50.12,109.48 v50.19,109.48 51.02,109.48 51.23,109.69 CHANGE_BUTTON.3 | v53.86,109.48 53.03,109.48 R_CHANGE.1 | v14.32,63.64 14.32,62.53 U2.23
  Bottom 0.15: v53.86,109.48 v50.19,109.48 50.19,109.42 49.5,108.72 49.5,98.82 v14.32,63.64
MISO  (via drill 0.3)
  Top 0.15: D12.2 14.94,97.16 14.25,97.85 12.93,97.85 12.52,97.44 11.41,97.44 R8.1 11.41,97.36 v10.72,96.67 | v6.56,92.52 5.46,92.52 J4.P7 | v18.47,52.98 27.34,52.98 29.55,55.19 31.77,55.19 U1.2 | v11.9,59.55 9.26,62.19 9.26,62.46 U2.27 9.2,62.53 8.64,63.09 8.64,66.13 TP_MISO.TP 8.71,66.06 v9.68,67.03
  Bottom 0.15: v10.72,96.67 v6.56,92.52 6.56,86.77 9.68,83.65 v9.68,67.03 | v11.9,59.55 v18.47,52.98
MOSI  (via drill 0.3)
  Top 0.15: v83.57,13.71 83.57,14.89 J1.14 | v76.99,18.56 76.99,18.91 76.51,19.39 D11.2 76.44,19.46 75.54,20.36 75.54,30.26 R7.1 75.4,30.33 v74.29,30.33 | v38.28,52.63 39.53,52.63 U1.5 39.66,52.63 v52.27,40.03 | v29,53.05 28.03,53.05 21.59,46.6 16.95,46.6 15.57,45.22 15.57,45.01 U2.7 15.77,45.5 v15.15,46.12 | v10.72,83.45 6.15,88.02 5.46,88.02 J4.P3 | v15.15,36.49 15.15,27.01 TP_MOSI.TP
  Bottom 0.15: v83.57,13.71 81.84,13.71 v76.99,18.56 | v38.28,52.63 38,52.63 36.69,51.31 30.52,51.31 29,52.84 v29,53.05 | v10.72,83.45 10.72,50.55 v15.15,46.12 v15.15,36.49 | v74.29,30.33 61.96,30.33 v52.27,40.03
N$1  (via drill 0.3)
  Top 0.15: v163,52.42 159.88,52.42 R2-USB1.2 | v165.7,52.7 165.28,53.12 164.73,53.12 J2.A5
  Bottom 0.15: v163,52.42 165.42,52.42 v165.7,52.7
N$2  (via drill 0.3)
  Top 0.15: v154.07,48.96 154,48.96 153.44,48.41 R2-USB.1 | v165.7,55.68 165.28,56.09 164.73,56.09 J2.B5
  Bottom 0.15: v154.07,48.96 154.07,49.24 154,49.31 154,49.58 160.09,55.68 v165.7,55.68
N$3  (via drill 0.3)
  Top 0.15: v125.47,40.86 125.19,40.58 124.77,40.58 C1_BAT1.1 | D2.1 122.77,42.38 124.77,42.38 v124.77,42.31 125.26,42.31 125.6,42.66 IC4.3 125.67,42.73 125.81,42.73 126.3,43.21 126.3,44.04 | 126.3,44.04 125.81,44.53 125.67,44.53 IC4.1 | Q1.2 135.78,50.9 135.02,50.9 129.27,45.15 127.47,45.15 126.37,44.04 126.3,44.04
  Bottom 0.15: v125.47,40.86 125.47,41.62 v124.77,42.31
N$4
  Top 0.15: C4.1 94.17,34.76 94.17,33.93 91.81,31.58 D3.2 91.81,31.65 88.35,35.11 88.35,35.73 D4.1
N$5
  Top 0.15: J1.24 78.65,14.96 78.65,18.07 EPD_C12.1
N$6
  Top 0.15: CHG_LED.C 124.64,57.06 123.04,57.06 R1_BAT.1
N$7  (via drill 0.3)
  Top 0.15: v122.77,55.95 121.73,56.99 R1_BAT.2 | v129.21,55.95 129.9,55.26 130.18,55.26 MCP73831.1
  Bottom 0.15: v129.21,55.95 v122.77,55.95
N$8
  Top 0.15: R2_BAT.2 125.81,55.05 127.41,55.05 127.54,55.19 MCP73831.5
N$9
  Top 0.15: IC1.5 50.54,98.2 C_DELAY.1
N$10
  Top 0.15: J1.22 79.62,16.14 81.56,18.07 EPD_C10.1
N$11  (via drill 0.3)
  Top 0.15: v82.32,54.78 88,49.1 R_CAPACITOR.1 | v82.32,61.98 82.32,63.09 D7.1
  Bottom 0.15: v82.32,61.98 v82.32,54.78
N$12
  Top 0.15: J1.20 80.66,14.96 80.66,15.51 82.6,17.45 84.05,17.45 84.61,18 EPD_C8.1
N$13  (via drill 0.3)
  Top 0.15: v81.49,15.72 81.15,15.37 81.15,14.96 J1.19 | v84.89,17.04 85.3,17.04 86.27,18 EPD_C7.1
  Bottom 0.15: v81.49,15.72 83.57,15.72 v84.89,17.04
N$14  (via drill 0.3)
  Top 0.15: v81.98,14.2 81.63,14.54 81.63,14.89 J1.18 | v87.52,17.31 87.52,17.8 87.72,18 EPD_C6.1
  Bottom 0.15: v81.98,14.2 84.4,14.2 v87.52,17.31
N$21  (via drill 0.3)
  Top 0.15: v88.28,14.13 88.56,14.4 88.56,14.89 J1.4 | v71.52,22.44 71.52,29.22 72.56,30.26 EPD_C1.1
  Bottom 0.15: v88.28,14.13 86.27,12.12 74.22,12.12 71.52,14.82 v71.52,22.44
N$22  (via drill 0.3)
  Top 0.15: v87.66,14.13 88.07,14.54 88.07,14.89 J1.5 | v72,14.96 71.73,14.96 71.24,15.44 EPD_C2.1
  Bottom 0.15: v87.66,14.13 87.45,14.13 85.72,12.4 74.57,12.4 v72,14.96
PREVGH  (via drill 0.3)
  Top 0.15: J1.21 80.18,14.96 80.18,15.44 82.74,18 83.08,18 EPD_C9.1 83.15,18.07 83.78,18.7 v85.3,18.7 | v81.28,37.81 81.28,39.47 D5.1
  Bottom 0.15: v81.28,37.81 81.28,22.71 v85.3,18.7
PREVGL  (via drill 0.3)
  Top 0.15: EPD_C11.1 80.04,18.07 79.14,17.17 79.14,14.96 J1.23 79.14,14.89 79.14,14.54 v79.48,14.2 | v91.81,32.34 D4.2
  Bottom 0.15: v91.81,32.34 91.81,20.98 84.05,13.23 80.45,13.23 v79.48,14.2
RESE  (via drill 0.3)
  Top 0.15: v88.9,14.13 89.11,14.34 89.11,14.89 J1.3 | v69.03,12.19 67.23,12.19 R3.2 67.23,12.26 67.02,12.46 67.02,14.06 Q3.2
  Bottom 0.15: v88.9,14.13 86.62,11.84 69.37,11.84 v69.03,12.19
RESE'
  Top 0.15: SJ1.2 65.56,10.39 65.98,10.8 67.16,10.8 R3.1 67.23,10.87 68.33,10.87 69.51,12.05 69.51,12.33 69.44,12.4 69.44,13.64 R2.2
RESET  (via drill 0.3)
  Top 0.15: R_RESET.1 67.99,109.62 66.33,109.62 66.26,109.69 RESET_BUTTON.3 66.19,109.76 62.79,109.76 RESET_BUTTON.4 62.73,109.69 61.06,109.69 60.92,109.55 C5.1 60.85,109.55 60.37,110.04 52.48,110.04 52.34,109.9 52.34,109.28 52.06,109 46.94,109 46.8,108.86 45.55,108.86 45.2,108.52 45.2,107.75 47.63,105.33 47.63,98.2 IC1.1 47.56,98.2 47.14,97.78 v46.8,97.78 | v11.41,50.48 10.51,49.58 10.51,45.01 U2.3
  Bottom 0.15: v11.41,50.48 11.41,61.35 16.61,66.55 16.81,66.55 46.8,96.53 v46.8,97.78
RTC_RST  (via drill 0.3)
  Top 0.15: v25.47,59.97 23.18,62.26 23.18,62.46 U2.16 | v79.28,59.97 80.38,58.86 80.38,58.59 U3.4
  Bottom 0.15: v79.28,59.97 v25.47,59.97
RX
  Top 0.15: U2.24 13.07,62.53 13.07,64.33 14.87,66.13 TP_RX.TP
SCK  (via drill 0.3)
  Top 0.15: v14.25,42.52 14.25,44.94 U2.6 | v14.25,31.16 10.1,27.01 TP_SCK.TP | v4.28,89.89 4.62,90.23 5.39,90.23 J4.P5 | v33.23,48.54 32.74,48.54 | 32.74,48.54 32.12,48.54 R6.1 | v34.19,48.54 35.02,48.54 D10.2 35.09,48.61 35.09,49.79 37.8,52.49 37.8,52.77 38.9,53.88 39.53,53.88 U1.6 39.6,53.88 53.45,40.03 v69.17,40.03 | v84.05,16.97 84.05,14.96 J1.13 | v32.67,46.47 32.67,46.74 32.74,46.81 32.74,48.54
  Bottom 0.15: v14.25,31.16 14.25,36.01 | 14.25,36.01 v14.25,42.52 14.25,42.59 7.05,49.79 7.05,64.15 4.28,64.15 v4.28,89.89 | v34.19,48.54 v33.23,48.54 | v84.05,16.97 84.05,19.53 76.85,26.73 76.85,32.34 v69.17,40.03 | 14.25,36.01 15.29,36.01 18.75,39.47 18.75,43.77 21.73,46.74 32.39,46.74 v32.67,46.47
SCL  (via drill 0.3)
  Top 0.15: SENSOR2.4 158.91,11.01 159.95,12.05 159.95,12.81 R2-PINH.1 160.02,12.88 v164.31,17.17 | v143.19,54.43 141.74,54.43 U4.7 | v143.19,42.94 165.28,20.84 J3.4 165.01,21.05 v164.31,20.36 | v19.03,61.29 18.13,62.19 18.13,62.46 U2.20 | v83.57,50.41 83.57,49.93 84.19,49.31 U3.16
  Bottom 0.15: v143.19,42.94 v143.19,54.43 143.19,55.05 137.58,60.66 93.75,60.66 83.57,50.48 v83.57,50.41 30.59,50.41 19.72,61.29 v19.03,61.29 | v164.31,20.36 v164.31,17.17
SDA  (via drill 0.3)
  Top 0.15: SENSOR2.3 158.08,11.01 158.15,11.08 158.15,12.81 R1_PINH.1 158.29,12.88 v159.12,13.71 | v142.43,54.91 141.74,54.91 U4.8 | 164.18,19.88 v142.43,41.62 | 164.18,19.88 165.28,19.88 J3.3 | v163.83,19.46 164.18,19.8 164.18,19.88 | v20,63.57 19.38,62.95 19.38,62.53 U2.19 | v81.63,50.9 82.88,49.65 82.88,49.31 U3.15 82.95,49.17 82.95,48.89 85.02,46.81 v86.27,46.81
  Bottom 0.15: v142.43,54.91 v142.43,41.62 133.71,41.62 132.46,40.37 92.71,40.37 v86.27,46.81 | v159.12,13.71 159.12,14.75 v163.83,19.46 | v20,63.57 20,61.42 30.52,50.9 v81.63,50.9
SRC  (via drill 0.3)
  Top 0.15: v92.78,36.15 94.17,36.15 C4.2 | 85.13,39.16 84.82,39.47 D5.2 | 85.13,39.16 v86.27,38.02 | v66.39,18.84 66.39,16.2 Q3.3 | v75.74,32.34 75.88,32.34 78.24,34.69 80.66,34.69 L1.1 80.73,34.76 85.13,39.16
  Bottom 0.15: v92.78,36.15 88.14,36.15 v86.27,38.02 | v66.39,18.84 66.39,21.81 75.74,31.16 v75.74,32.34
SS_SD  (via drill 0.3)
  Top 0.15: R10.1 40.84,37.26 40.84,39.13 D8.2 40.7,39.2 40.01,39.89 37.38,39.89 33.36,43.9 v33.36,44.11 | 13.56,47.02 11.76,45.22 11.76,45.01 U2.4 | v16.74,47.02 13.56,47.02 | v9.2,83.52 5.8,86.91 J4.P2 | v13.56,47.09 13.56,47.02
  Bottom 0.15: v16.74,47.02 32.74,47.02 33.36,46.4 v33.36,44.11 | v9.2,83.52 9.2,51.45 v13.56,47.09
TX
  Top 0.15: U2.25 11.76,62.53 11.76,66.13 TP_TX.TP
USB_D+  (via drill 0.3)
  Top 0.15: v156.97,49.93 157.46,49.44 157.94,49.44 D1.4 | v30.45,52.01 30.45,50.97 24.5,45.01 U2.14
  Bottom 0.15: v156.97,49.93 155.66,49.93 154.2,48.48 150.19,48.48 137.72,60.94 89.11,60.94 81.08,52.91 38.63,52.91 38.42,53.12 31.56,53.12 v30.45,52.01
USB_D-  (via drill 0.3)
  Top 0.15: v155.38,53.88 157.94,51.31 D1.6 | v30.32,52.63 30.32,52.49 29.83,52.01 29.83,51.87 23.18,45.22 23.18,45.01 U2.13
  Bottom 0.15: v155.38,53.88 145.2,53.88 132.25,66.83 88.83,66.83 87.52,68.14 79.34,68.14 71.66,60.45 25.33,60.45 24.98,60.11 24.98,57.96 v30.32,52.63
VBAT
  Top 0.3: C2_BAT.1 127.2,52.42 125.88,52.42 123.87,54.43 123.87,55.61 124.64,56.37 125.26,56.37 125.47,56.58 125.47,59.62 126.92,61.08 128.17,61.08 130.18,59.07 130.18,57.13 MCP73831.3 130.31,56.99 130.94,56.99 134.75,53.18 Q1.3 134.88,53.12 135.51,53.12 136.27,53.88 139.04,53.88 | U4.2 139.73,54.36 139.73,53.95 U4.3 139.59,53.88 139.04,53.88 | 139.04,53.88 139.04,55.19 140.84,56.99 140.84,64.13 TP_VBAT.TP
VBUS
  Top 0.3: C1_BAT.1 120.89,44.18 122.42,44.18 122.7,44.46 D2.2 122.83,44.6 131.18,52.94 | CHG_LED.A 126.23,57.06 127.54,57.06 MCP73831.4 | 131.18,52.94 127.61,56.51 127.61,56.92 MCP73831.4 | 131.18,52.94 133.15,50.97 Q1.1 134.05,51.04 134.61,51.04 135.3,51.73 154.55,51.73 | R1_PWRUSB.2 127.54,57.2 MCP73831.4 | 154.55,51.73 154.83,52.01 154.83,62.26 TP_VBUS.TP | 154.55,51.73 154.55,50.83 155.04,50.34 155.31,50.34 D1.2 155.45,50.28 155.87,50.28 157.04,49.1 157.04,48.96 158.91,47.09 C5_USB.1 159.05,47.09 159.05,45.64 C4_USB.1 158.98,45.5 158.84,45.36 158.84,42.66 PFMF.050.1.2
VRTC
  Top 0.3: C10_SUPERCAP.1 90.56,50.55 90.42,50.41 88.07,50.41 R_CAPACITOR.2 87.93,50.48 87.38,50.48 82.53,55.33 82.11,55.33 81.08,54.29 81.08,49.93 81.63,49.38 U3.14 81.7,49.24 81.98,48.96 81.98,45.15 C8.1
VUSB
  Top 0.3: J2.A4 164.73,51.87 164.73,52.08 J2.B9 164.59,52.15 164.04,52.15 | J2.A9 164.73,56.85 164.73,56.65 J2.B4 164.59,56.58 164.04,56.58 163.48,56.02 163.48,52.7 164.04,52.15 | 164.04,52.15 163.97,52.01 163.97,51.73 160.99,48.75 160.99,41.83 159.68,40.51 156.42,40.51 154.34,42.59 PFMF.050.1.1